# Altium PCB ADC_NEW.PcbDoc
Units mil, origin at the board's own origin, x right, y up, seen from the top; angles counter-clockwise.
Board outline 2992.13 x 1200.79 mil, 2 copper layers (Top Layer, Bottom Layer); 29 components, 39 nets, 146 pads, 12 vias.
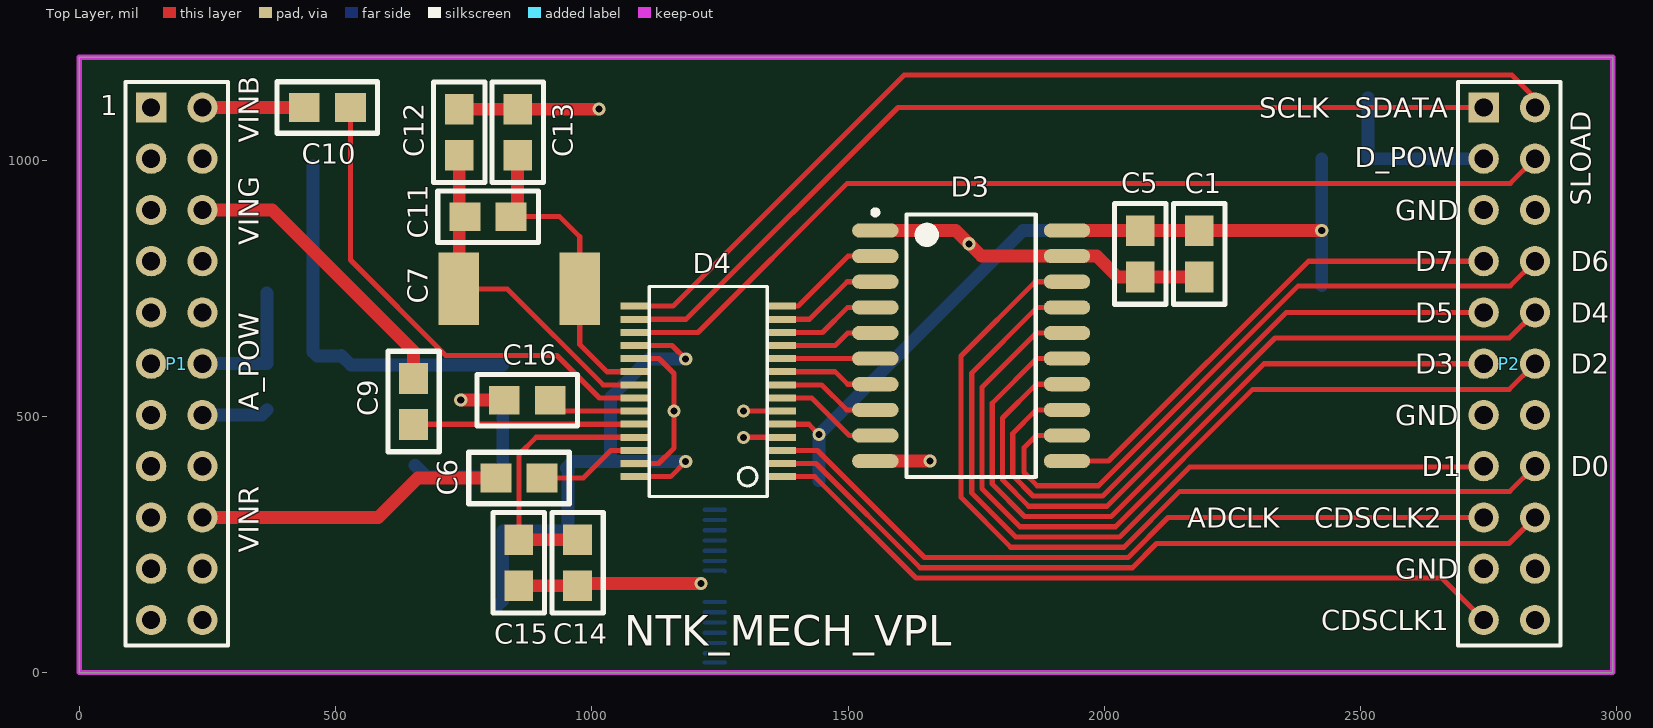
[diagram p0: Top Layer view]
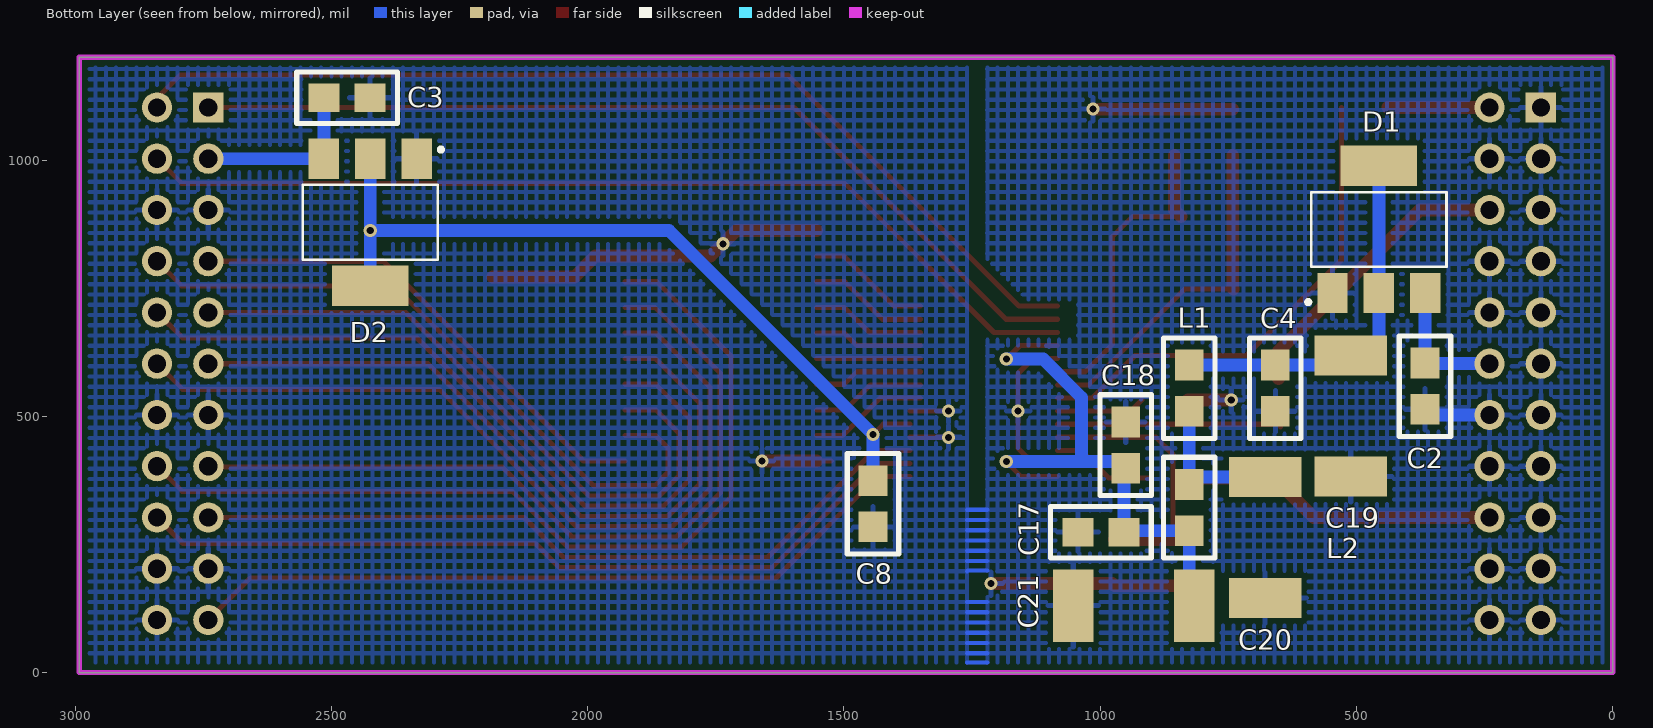
[diagram p1: Bottom Layer view, seen from below]

## Layer stack, top to bottom
Top Solder: solder mask 0.4, Solder Resist, Dk 3.5
Top Layer: signal copper 1.4
Dielectric 1: dielectric 12.6, FR-4, Dk 4.8
Bottom Layer: signal copper 1.4
Bottom Solder: solder mask 0.4, Solder Resist, Dk 3.5

## Board outline
0,0 2992.13,0 2992.13,1200.79 0,1200.79

## Design rules (kind name [scope] priority, off if disabled: settings)
Clearance [All] p1: gap=10
PolygonConnect [All] p1: connectstyle=Relief reliefconductorwidth=10 reliefentries=4 polygonreliefangle="90 Angle" airgapwidth=10
RoutingVias [All] p1: holewidth=28 width=50 viastyle="Through Hole" minholewidth=28 minwidth=50 maxholewidth=28 maxwidth=50
SolderMaskExpansion [All] p1: expansion=4
Width [All] p1: maxlimit=49.37 minlimit=5 preferedwidth=10
29 further rules are at their usual default settings.

## Components (designator, comment, footprint, x,y, rotation, side; value= is the part's Value field where it differs from the comment)
C1 "0,1" CAP_SMALL#1 2235.32,718.38 r90 top
C2 "1,0" CAP_SMALL#1 416.32,657.8 r270 bottom
C3 "1,0" CAP_SMALL#1 2568.32,1071.8 r180 bottom
C4 "1,0" CAP_SMALL#1 708.32,653.8 r270 bottom
C5 "1,0" CAP_SMALL#1 2020.32,915.8 r270 top
C6 "0,1" CAP_SMALL#1 759.32,329.8 r0 top
C7 "10,0" Cap_BIG#1 697.32,673.8 r90 top
C8 "0,1" CAP_SMALL#1 1393.32,230.8 r90 bottom
C9 "0,1" CAP_SMALL#1 602.32,627.8 r270 top
C10 "0,1" CAP_SMALL#1 385.32,1052.8 r0 top
C11 "0,1" CAP_SMALL#2 896.32,839.8 r180 top
C12 "0,1" CAP_SMALL#2 691.32,955.8 r90 top
C13 "0,1" CAP_SMALL#2 805.32,955.8 r90 top
C14 "1,0" CAP_SMALL#1 1022.31,115.8 r90 top
C15 "0,1" CAP_SMALL#1 807.81,313.21 r270 top
C16 "0,1" CAP_SMALL#1 775.32,481.8 r0 top
C17 "0,1" CAP_SMALL#1 1097.32,224.13 r180 bottom
C18 "0,01" CAP_SMALL#1 1000.32,542.8 r270 bottom
C19 "10,0" Cap_BIG#2 436.32,661.87 r0 bottom
C20 "10,0" Cap_BIG#2 603.32,424.8 r0 bottom
C21 "10,0" Cap_BIG#2 773.32,55.8 r90 bottom
D1 "ADP3339" SOT230P700X180-4N 456.32,864.8 r180 bottom
D2 "ADP3339" SOT230P700X180-4N 2424.32,878.8 r0 bottom
D3 "74AC541" 20S_M 1740.32,637.8 r0 top
D4 "AD9826" SSOP-28 1227.32,548.8 r90 top
L1 "IND" RES 777.32,652.8 r0 bottom
L2 "IND" RES 777.32,419.8 r0 bottom
P1 "Header 11X2" HDR2X11 140.32,1102.8 r270 top
P2 "Header 11X2" HDR2X11 2740.32,1102.8 r270 top

## Footprints (in the part's own frame and the unit in brackets; to place one, negate y for a bottom-side part, rotate by r counter-clockwise, add the part's x,y. Pads: shape width x height; smd on the part's side, far side on the other; paste and mask are expansions set on the pad)
20S_M [mm] "20-Pin Small Outline Integrated Circuit 1.27 mm Pitch, IPC Low Density"
  oval 2.3x0.7 smd: 1(-4.75,5.715) 2(-4.75,4.445) 3(-4.75,3.175) 4(-4.75,1.905) 5(-4.75,0.635) 6(-4.75,-0.635) 7(-4.75,-1.905) 8(-4.75,-3.175) 9(-4.75,-4.445) 10(-4.75,-5.715) 11(4.75,-5.715) 12(4.75,-4.445) 13(4.75,-3.175) 14(4.75,-1.905) 15(4.75,-0.635) 16(4.75,0.635) 17(4.75,1.905) 18(4.75,3.175) 19(4.75,4.445) 20(4.75,5.715)
  silkscreen extent -4.87,-6.5 3.2,6.74, body extent -3.8,-6.5 3.8,6.5, height 2.67
Cap_BIG#1 [mm] "FROM_MAX"
  rect 3.6x2 smd: 1(1.905,-7.092) 2(1.905,-1.092)
  body extent 0,-8.19 3.81,0.01, height 2.54
Cap_BIG#2 [mm] "FROM_MAX"
  rect 3.6x2 smd: 1(1.905,7.092) 2(1.905,1.092)
  body extent 0,-0.01 3.81,8.19, height 2.54
CAP_SMALL#1 [mil] "FROM_MAX"
  rect 60x55.98 smd: 1(53.71,50) 2(143.71,50)
  silkscreen extent 1,0 197,100, body extent 20,18 178,82, height 100
CAP_SMALL#2 [mil] "FROM_MAX"
  rect 60x55.98 smd: 1(53.71,-50) 2(143.71,-50)
  silkscreen extent 1,-100 197,0, body extent 20,-82 178,-18, height 100
HDR2X11 [mm] "Connector; Header; 11x2 Position"
  rect 1.5x1.5 hole 0.9: 1(0,0)
  round 1.5 hole 0.9: 2(0,2.54) 3(2.54,0) 4(2.54,2.54) 5(5.08,0) 6(5.08,2.54) 7(7.62,0) 8(7.62,2.54) 9(10.16,0) 10(10.16,2.54) 11(12.7,0) 12(12.7,2.54) 13(15.24,0) 14(15.24,2.54) 15(17.78,0) 16(17.78,2.54) 17(20.32,0) 18(20.32,2.54) 19(22.86,0) 20(22.86,2.54) 21(25.4,0) 22(25.4,2.54)
  silkscreen extent -1.27,-1.27 26.67,3.81
RES [mil] "FROM_MAX"
  rect 55.98x60 smd: 1(49,52.71) 2(49,142.71)
  silkscreen extent -1,0 99,196, body extent 17,19 81,177, height 100
SOT230P700X180-4N [mm]
  rect 1.5x2 smd: 1(-2.3,-3.15) 2(0,-3.15) 3(2.3,-3.15)
  rect 3.8x2 smd: 4(0,3.15)
  silkscreen extent -3.6,-3.7 3.35,1.85
SSOP-28 [mil]
  rect 13.7x55 smd: 1(-166.34,-143.94) 2(-140.75,-143.94) 3(-115.16,-143.94) 4(-89.57,-143.94) 5(-63.98,-143.94) 6(-38.39,-143.94) 7(-12.8,-143.94) 8(12.8,-143.94) 9(38.39,-143.94) 10(63.98,-143.94) 11(89.57,-143.94) 12(115.16,-143.94) 13(140.75,-143.94) 14(166.34,-143.94) 15(166.34,143.94) 16(140.75,143.94) 17(115.16,143.94) 18(89.57,143.94) 19(63.98,143.94) 20(38.39,143.94) 21(12.8,143.94) 22(-12.8,143.94) 23(-38.39,143.94) 24(-63.98,143.94) 25(-89.57,143.94) 26(-115.16,143.94) 27(-140.75,143.94) 28(-166.34,143.94)
  silkscreen extent -205,-115 205,115

## Part data
C1 C2 C3 C4 C5 C6 C7 C8 C9 C10 C11 C12 C13 C14 C15 C16 C17 C18 C19 C20 C21: library part CAP_SMALL
L1 L2: library part RES
P1 P2: "Header, 11-Pin, Dual row"

## Via types
v1: diameter 25.59, hole 13.78, Top Layer to Bottom Layer, 12 vias

## Nets (pads, with @x,y where several pads share a name; then routed paths per layer and width w, separated by ;. In a path a pad name is that pad's centre, name@x,y a point inside that pad or via, vN(x,y) a via of type N, cw(c..) or ccw(c..) an arc to the next point about the centre after c; other vN are vias at no path point)
5V: C1.2 C5.1 C8.2 D2.2 D2.4 D3.20 D4.5 | length 2061.5
  Top Layer w10: D4.5 1423.29,484.82 v1(1443.32,464.8)
  Top Layer w25: D3.20 v1(2424.32,862.8)
  Bottom Layer w25: C8.2 v1(1443.32,464.8) 1841.32,862.8 v1(2424.32,862.8) ; D2.4 v1(2424.32,862.8) ; D2.2 v1(2424.32,862.8)
"(LSB) D0": D3.2 D4.14 | length 242.5
  Top Layer w10: D4.14@1351.25,715.13 1402.65,715.13 1500.32,812.8 D3.2
"(LSB) D0_BUF": D3.18 P2.16 | length 1768.5
  Top Layer w10: D3.18 1865.32,762.8 1720.32,617.8 1720.32,342.1 1817.62,244.8 2038.3,244.8 2147.3,353.8 2791.32,353.8 P2.16
A_POW: C2.1 D1.3 P1.12 | length 264
  Bottom Layer w25: P1.12 240.61,603.09 366.32,603.09 366.32,740.23 D1.3
ADCCLK: D4.3 P2.17 | length 1487.9
  Top Layer w10: D4.3 1440.47,433.64 1649.32,224.8 2046.59,224.8 2124.59,302.8 P2.17
AVDD: C17.2 C18.2 C21.2 D4.18 D4.28 L2.2 | length 1169.6
  Top Layer w10: D4.28 1153.98,382.46 v1(1183.32,411.8) ; D4.18 1156.75,638.36 v1(1183.32,611.8)
  Bottom Layer w25: C21.2 826.31,140.79 L2.2 950.65,277.09 C17.2 953.61,395.8 C18.2 963.02,411.8 1036.32,411.8 ; v1(1183.32,411.8) 1036.32,411.8 ; v1(1183.32,611.8) 1111.32,611.8 1036.32,536.8 1036.32,411.8
AVDD_STAB: C4.1 C19.2 D1.2 D1.4 L1.1 | length 744.1
  Bottom Layer w25: D1.4 D1.2 456.32,625.8 464.32,617.8 C19.2@511.31,617.8 ; C19.2 530.09,600.09 C4.1 L1.1
CAPB: C7.1 C11.1 C13.1 D4.20 | length 614.1
  Top Layer w10: C11.1 937.32,889.8 976.54,850.57 C7.1 976.54,640.57 1029.93,587.18 D4.20
  Top Layer w25: C11.1 855.32,902.5 C13.1
CAPT: C7.2 C11.2 C12.1 D4.21 | length 681.7
  Top Layer w10: C7.2 835.32,748.79 1022.52,561.59 D4.21
  Top Layer w25: C7.2 741.32,749.79 C12.1
CDSCLK1: D4.1 P2.21 | length 1484.9
  Top Layer w10: D4.1 1435.09,382.46 1632.75,184.8 2658.32,184.8 P2.21
CDSCLK2: D4.2 P2.18 | length 1593.8
  Top Layer w10: D4.2 1437.78,408.05 1641.03,204.8 2054.87,204.8 2102.09,252.02 2789.54,252.02 P2.18
CML: C16.2 D4.23 | length 173.2
  Top Layer w10: C16.2 940.41,510.41 D4.23
D1: D3.3 D4.13 | length 232.4
  Top Layer w10: D4.13@1351.25,689.54 1425.06,689.54 1498.32,762.8 D3.3
D1_BUF: D3.17 P2.15 | length 1564.8
  Top Layer w10: D3.17 1869.32,712.8 1741.32,584.8 1741.32,350.8 1827.32,264.8 2030.02,264.8 2166.17,400.94 2738.46,400.94 P2.15
D2: D3.4 D4.12 | length 222.3
  Top Layer w10: D4.12@1351.25,663.95 1450.47,663.95 1499.32,712.8 D3.4
D2_BUF: D3.16 P2.12 | length 1649.1
  Top Layer w10: D3.16 1867.32,662.8 1761.32,556.8 1761.32,359.08 1835.6,284.8 2021.74,284.8 2289.74,552.8 2790.32,552.8 P2.12
D3: D3.5 D4.11 | length 212.2
  Top Layer w10: D4.11@1351.25,638.36 1474.88,638.36 1499.32,662.8 D3.5
D3_BUF: D3.15 P2.11 | length 1448.5
  Top Layer w10: D3.15 1868.32,612.8 1781.32,525.8 1781.32,367.94 1844.46,304.8 2013.45,304.8 2311.45,602.8 P2.11
D4: D3.6 D4.10 | length 202.1
  Top Layer w10: D4.10@1351.25,612.77 D3.6
D4_BUF: D3.14 P2.10 | length 1490.8
  Top Layer w10: D3.14 1867.32,562.8 1801.32,496.8 1801.32,376.23 1852.75,324.8 2005.17,324.8 2333.17,652.8 2790.32,652.8 P2.10
D5: D3.7 D4.9 | length 212.2
  Top Layer w10: D4.9@1351.25,587.18 1474.93,587.18 1499.32,562.8 D3.7
D5_BUF: D3.13 P2.9 | length 1291.1
  Top Layer w10: D3.13 1867.32,512.8 1821.32,466.8 1821.32,384.51 1861.03,344.8 1996.88,344.8 2354.88,702.8 P2.9
D6: D3.8 D4.8 | length 222.3
  Top Layer w10: D4.8@1351.25,561.59 1448.52,561.59 1497.32,512.8 D3.8
D6_BUF: D3.12 P2.8 | length 1331.1
  Top Layer w10: D3.12 1867.32,462.8 1843.32,438.8 1843.32,390.8 1869.32,364.8 1988.6,364.8 2378.6,754.8 2792.32,754.8 P2.8
D_POW: C3.1 D2.3 P2.3 | length 344.5
  Bottom Layer w25: C3.1 2514.61,1003.07 D2.3 P2.3
GND: C1.1 C2.2 C3.2 C4.2 C5.2 C8.1 C12.2 C13.2 C14.1 C15.2 C16.1 C17.1 C18.1 C19.1 C20.1 C21.1 D1.1 D2.1 D3.1 D3.10 D3.19 D4.4 D4.6 D4.19 D4.27 P1.1 P1.3 P1.4 P1.5 P1.7 P1.8 P1.9 P1.10 P1.11 P1.13 P1.14 P1.15 P1.16 P1.17 P1.19 P1.20 P1.21 P1.22 P2.5 P2.6 P2.13 P2.14 P2.19 P2.20 P2.22 | length 2677.3
  Top Layer w10: D4.27 1130.32,408.05 1160.32,438.05 1160.32,583.51 1131.05,612.77 D4.19 ; v1(1295.75,459.23) D4.4 ; v1@1296.32,510.41 D4.6 ; D3.10@1524.32,412.8 D3.10
  Top Layer w25: C12.2 C13.2 v1(1014.02,1099.5) ; v1(744.32,531.8) C16.1 ; C15.2 C14.1 976.61,173.8 v1(1213.32,173.8) ; D3.10 v1(1660.32,412.8) ; D3.1 1710.32,862.8 1760.32,812.8 D3.19 1985.32,812.8 2026.02,772.09 C1.1
  Bottom Layer w8: 1220.47,19.69 1260.32,19.69 ; 1220.47,37.8 1259.84,37.8 ; 1220.47,57.8 1259.84,57.8 ; 1220.47,77.8 1259.84,77.8 ; 1220.47,97.8 1259.84,97.8 ; 1220.47,117.8 1259.84,117.8 ; 1220.47,137.8 1259.84,137.8 ; 1220.47,199.62 1258.02,199.62 1259.84,197.8 ; 1220.47,217.8 1259.84,217.8 ; 1220.47,237.8 1259.84,237.8 ; 1220.47,257.8 1259.84,257.8 ; 1220.47,277.8 1259.84,277.8 ; 1220.47,297.8 1259.84,297.8 ; 1220.47,317.8 1259.84,317.8
  Bottom Layer w25: P1.14 356.02,502.8 C2.2@366.32,513.09
  other v1: 1160.32,510.78 1296.32,510.8 1736.32,836.8
"MSB (D7)": D3.9 D4.7 | length 232.4
  Top Layer w10: D4.7@1351.25,536 1429.39,536 1502.6,462.8 D3.9
"MSB (D7)_BUF": D3.11 P2.7 | length 974.5
  Top Layer w10: D3.11 2008.32,412.8 2398.32,802.8 P2.7
NetC6_2: C6.2 D4.26 | length 202.7
  Top Layer w10: C6.2 983.32,379.8 1037.16,433.64 D4.26
NetC9_2: C9.2 D4.24 | length 437.5
  Top Layer w10: C9.2@648.02,479.8 653.05,484.82 D4.24
NetC10_2: C10.2 D4.22 | length 963.5
  Top Layer w10: C10.2 529.02,805.09 715.02,619.09 932.02,619.09 1015.11,536 D4.22
NetC20_2: C20.2 L1.2 L2.1 | length 329.6
  Bottom Layer w25: C20.2@655.31,404.8 C20.2 811.61,381.8 L2.1 L1.2
OFFSET: C14.2 C15.1 D4.25 | length 519.9
  Top Layer w10: C15.1 858.02,259.71 858.02,425.5 891.75,459.23 D4.25
  Top Layer w25: C15.1 C14.2
SCLK: D4.16 P2.1 | length 1828.1
  Top Layer w10: D4.16 1184.06,689.54 1597.32,1102.8 P2.1
SDATA: D4.15 P2.2 | length 1980.2
  Top Layer w10: D4.15 1158.65,715.13 1609.32,1165.8 2795.32,1165.8 2840.32,1120.8 P2.2
SLOAD: D4.17 P2.4 | length 1897.3
  Top Layer w10: D4.17 1207.47,663.95 1498.32,954.8 2792.32,954.8 P2.4
VINB: C10.1 P1.2 | length 198.7
  Top Layer w25: P1.2 C10.1
VING: C9.1 P1.6 | length 579.3
  Top Layer w25: P1.6 376.73,902.8 652.32,627.21 C9.1
VINR: C6.1 P1.18 | length 604.6
  Top Layer w25: P1.18 583.32,302.8 660.32,379.8 C6.1

## Polygon pours and split planes (outlines as drawn)
GND on Bottom Layer "Top Layer-No Net" (hatched 90Degree grid 20 track 8, remove dead copper, pour order 10): 19.69,19.69 1220.47,19.69 1220.47,1181.1 19.69,1181.1
GND on Bottom Layer "Top Layer-No Net" (hatched 90Degree grid 20 track 8, remove dead copper, pour order 4): 1259.84,19.69 1259.84,1181.1 2972.44,1181.1 2972.44,19.69

## Keep-outs
Keep-Out Layer:
  the board outline again, w10

## Other copper
Multi-Layer:
  pour cut-out: 1240.16,826.77 1141.73,728.35 1043.31,728.35 1043.31,649.61 1240.16,649.61

## Silkscreen, mask and mechanical layers (free items; w line width, h text height)
Top Overlay:
  text "1" at 41.32,1087.8 h39.37
  text "SCLK" at 2302.32,1083.12 h39.37
  text "SDATA" at 2488.6,1083.12 h39.37
  text "VINB" at 350.32,1033.92 h39.37 r90
  text "D_POW" at 2488.6,986.4 h39.37
  text "SLOAD" at 2949.67,910.96 h39.37 r90
  text "GND" at 2567.32,883.12 h39.37
  text "VING" at 350.32,833.92 h39.37 r90
  text "D7" at 2606.67,783.12 h39.37
  text "D6" at 2910.32,783.12 h39.37
  text "D5" at 2606.67,683.12 h39.37
  text "D4" at 2910.32,683.12 h39.37
  text "D3" at 2606.67,583.12 h39.37
  text "D2" at 2910.32,583.12 h39.37
  text "A_POW" at 350.32,510.96 h39.37 r90
  text "GND" at 2567.32,483.12 h39.37
  text "D1" at 2619.79,383.12 h39.37
  text "D0" at 2910.32,383.12 h39.37
  text "ADCLK" at 2162.32,283.12 h39.37
  text "CDSCLK2" at 2409.89,283.12 h39.37
  text "VINR" at 350.32,233.92 h39.37 r90
  text "GND" at 2567.32,183.12 h39.37
  text "CDSCLK1" at 2423,83.12 h39.37
  text "NTK_MECH_VPL" at 1063.32,52.8 h60